# Altium PCB SE_13.PcbDoc (part 2 of 3)
Units mil, origin at the board's own origin, x right, y up, seen from the top; angles counter-clockwise.
Board outline 3937.01 x 3937.01 mil, 4 copper layers (Top, GND, PWR, Bottom), stack 35.4 mil thick; 269 components, 124 nets, 773 pads, 1135 vias.
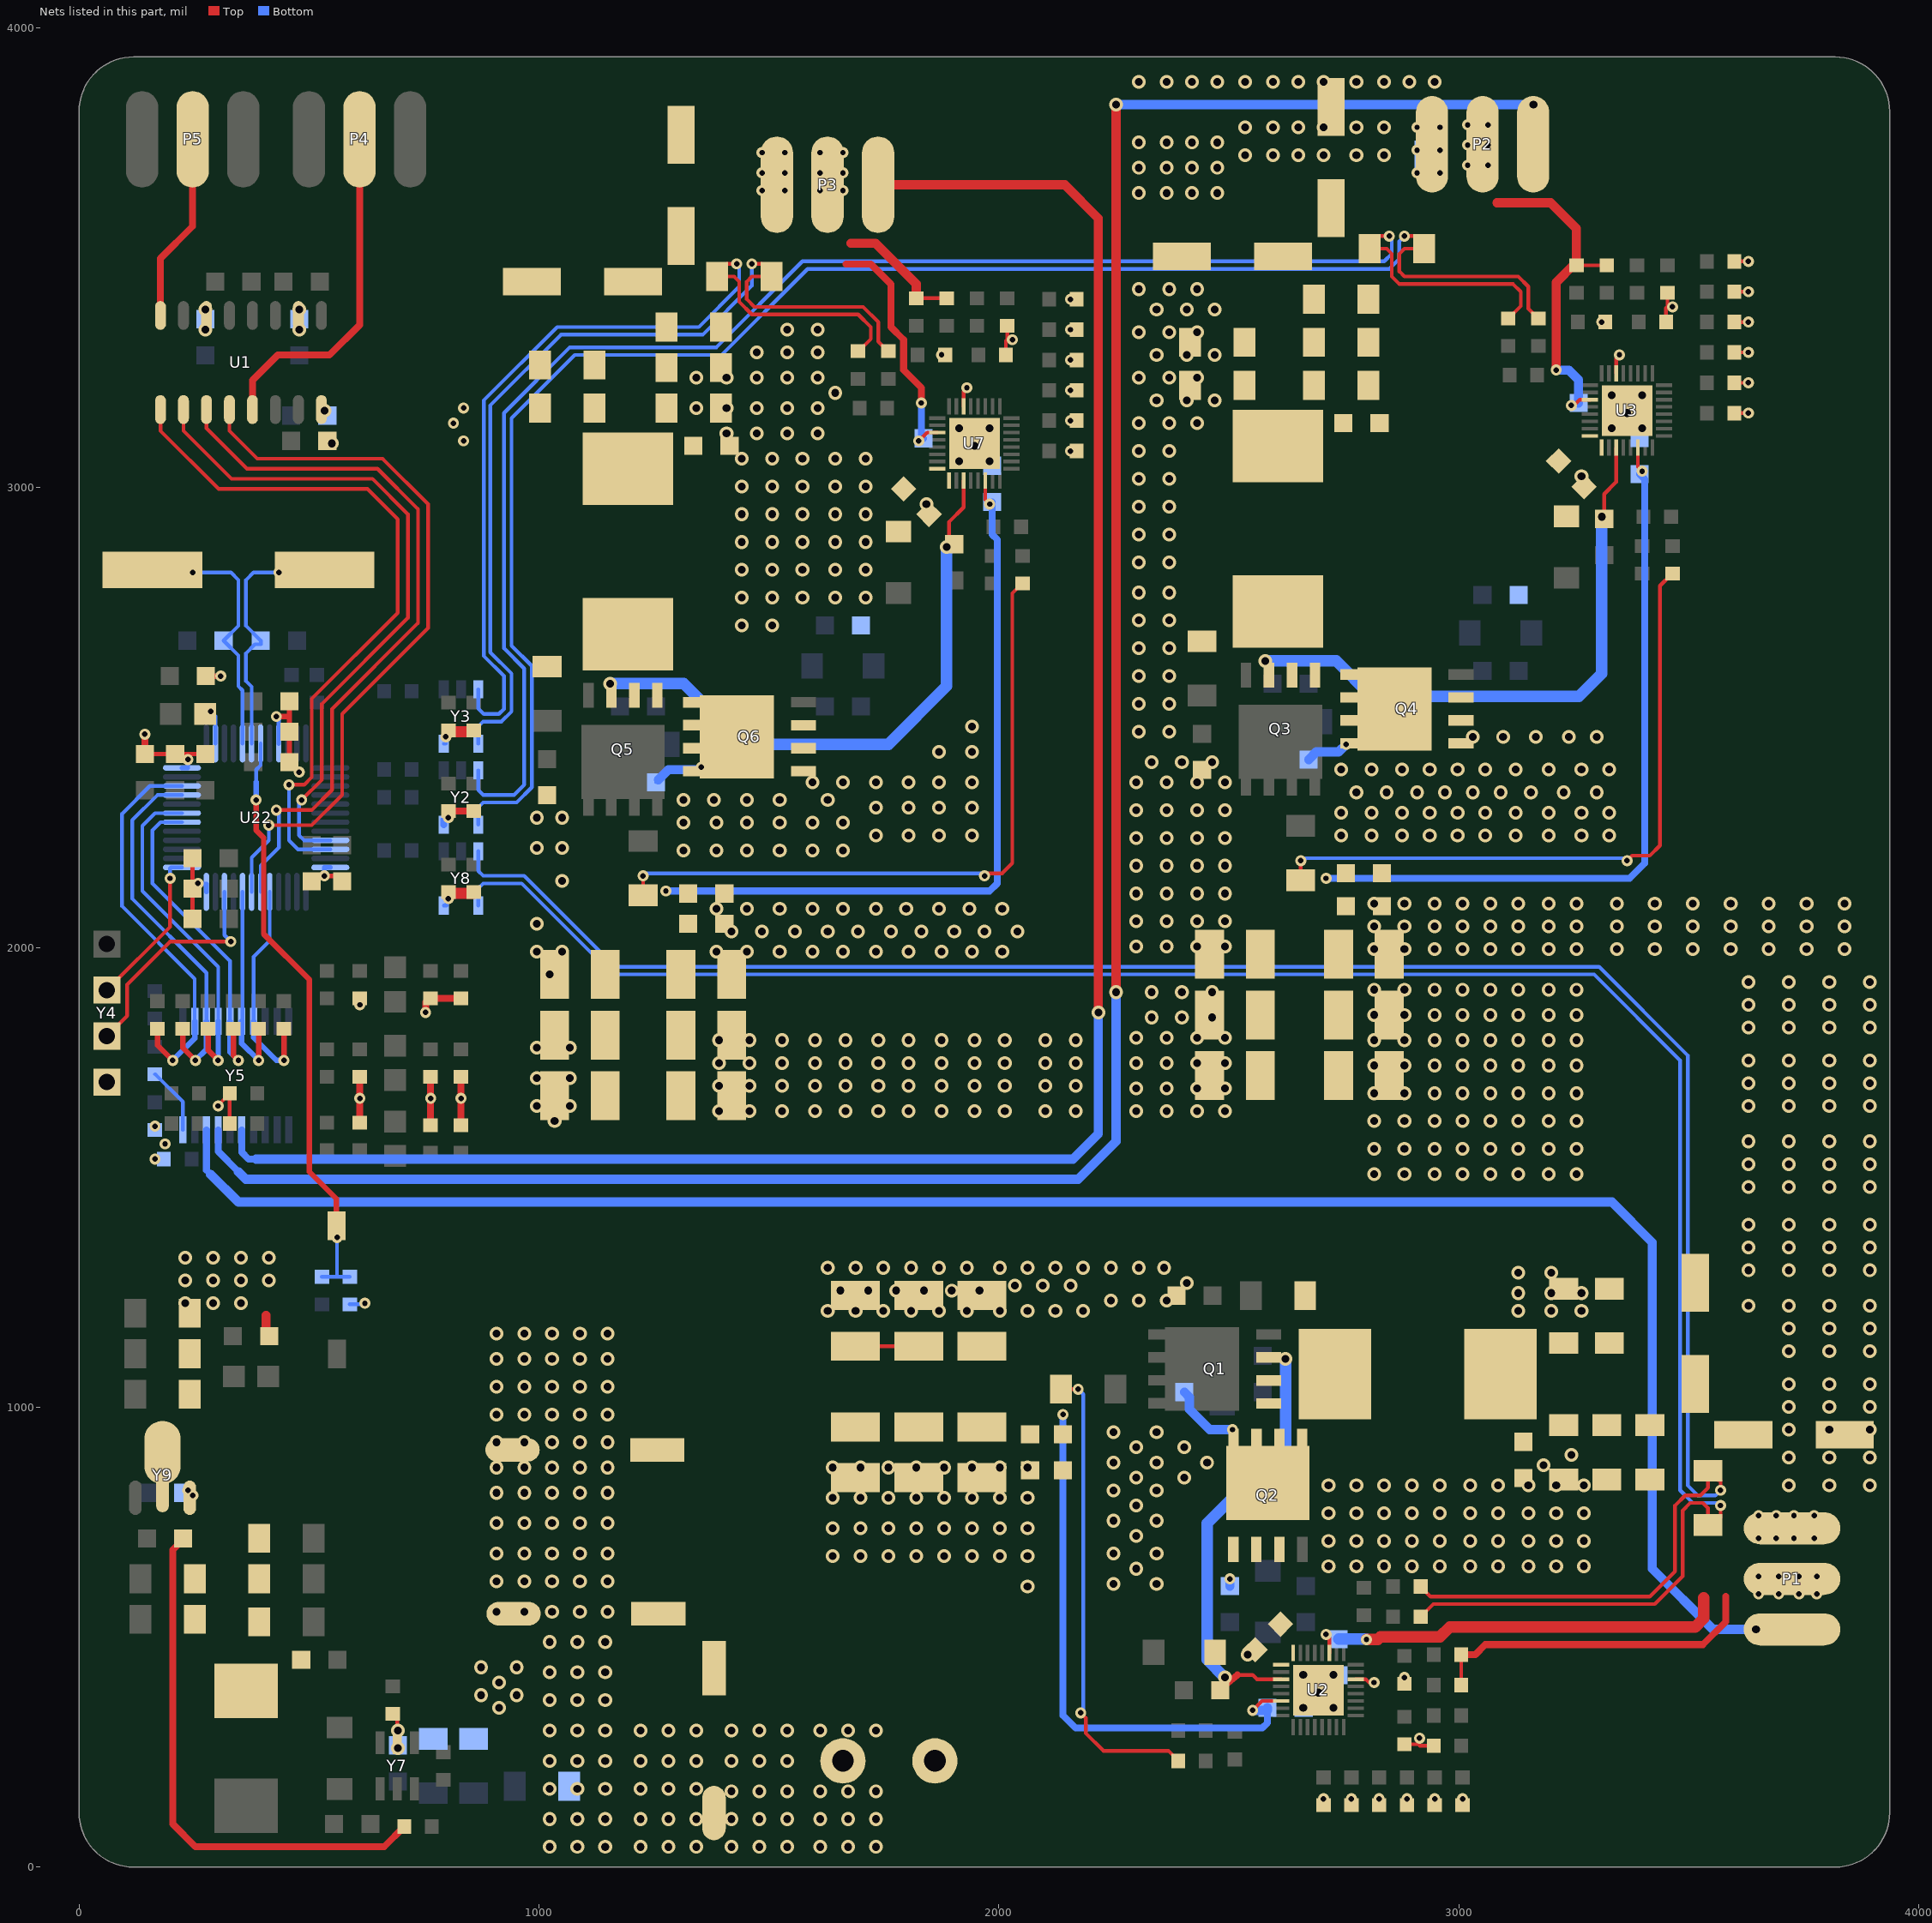
[diagram p4: the nets of this part, all layers, seen from the top]

## Via types
v1: diameter 30, hole 17, Top to Bottom, 881 vias
v2: diameter 24, hole 12, Top to Bottom, 254 vias

## Nets (pads, with @x,y where several pads share a name; then routed paths per layer and width w, separated by ;. In a path a pad name is that pad's centre, name@x,y a point inside that pad or via, vN(x,y) a via of type N, cw(c..) or ccw(c..) an arc to the next point about the centre after c; other vN are vias at no path point) (continued)
GND: C1.2 C2.2 C3.2 C4.2 C7.1 C8.2 C9.2 C10.2 C11.2 C12.2 C14.2 C15.2 C16.2 C17.2 C18.2 C19.2 C20.2 C22.1 C23.2 C24.2 C25.1 C26.2 C27.2 C28.2 C29.2 C30.2 C31.2 C32.2 C41.2 C42.2 C43.2 C44.2 C45.2 C46.2 C47.2 C48.2 C51.1 C53.1 C55.2 C56.2 C57.1 C58.2 C59.2 C60.2 C61.2 C62.2 C63.2 C64.2 C65.2 C74.2 C75.2 C76.2 C77.2 C78.2 C79.2 C80.2 C81.2 C82.2 C83.2 C84.2 C85.2 C88.1 C90.1 C92.2 C93.2 C94.1 C95.2 C96.2 C97.2 C98.2 C99.2 C100.2 C101.2 C107.2 C109.2 C110.2 C111.2 C112.2 P1.3 P2.3 P3.3 Q2.1 Q2.2 Q2.3 Q4.1 Q4.2 Q4.3 Q6.1 Q6.2 Q6.3 R1.1 R6.2 R11.1 R15.1 R16.1 R17.1 R18.1 R30.1 R37.1 R41.1 R42.1 R43.1 R44.1 R53.1 R60.1 R63.1 R64.1 R65.1 R66.1 U2.14 U2.25 U2.33 U3.14 U3.25 U3.33 U5.1 U7.14 U7.25 U7.33 | length 751.1
  Top w8: v2(1875.5,3289) R60.1@1883.42,3289 ; U7.14@1923.38,3177.21 1923.38,3210.38 v2(1930.5,3217.5) ; C93.2@2015.42,3289 2015.42,3319.65 v2@2018.5,3322.73 ; C92.2@2018.5,3352.58 v2@2018.5,3322.73 ; v2(2029.5,3322) 2028.77,3322.73 v2@2018.5,3322.73 ; v2(2156,3080) R64.1@2169.42,3080 ; v2(2156,3146) R63.1@2169.42,3146 ; v2(2156,3212) C96.2@2169.42,3212 ; v2(2156,3278) R65.1@2169.42,3278 ; v2(2156,3344) C97.2@2169.42,3344 ; v2(2156,3410) R66.1@2169.42,3410 ; R16.1@2706,135.08 v2(2706,148.5) ; R15.1@2766.5,135.08 v2(2766.5,148.5) ; U2.14@2775.71,408.62 2797.88,408.62 2805,401.5 v2(2816,401.5) ; C27.2@2827,135.08 v2(2827,148.5) ; C24.2@2882,267.08 2912.65,267.08 ; R1.1@2882,399.08 v2(2882,412.5) ; R17.1@2887.5,135.08 v2(2887.5,148.5) ; v2(2915,280.5) 2912.65,278.15 2912.65,267.08 ; C23.2@2945.58,264 2915.73,264 2912.65,267.08 ; C28.2@2948,135.08 v2(2948,148.5) ; R18.1@3008.5,135.08 v2(3008.5,148.5) ; v2(3311,3360.5) R37.1@3318.92,3360.5 ; U3.14@3342.38,3248.71 3342.38,3281.88 v2(3349.5,3289) ; C56.2@3450.92,3360.5 3450.92,3391.15 v2@3453.27,3393.5 ; C55.2@3454,3424.08 3454,3394.23 v2@3453.27,3393.5 ; v2(3465,3393.5) v2@3453.27,3393.5 ; R42.1@3599.42,3162.5 v2(3630,3162.5) ; R41.1@3599.42,3228.5 v2(3630,3228.5) ; C59.2@3599.42,3294.5 v2(3630,3294.5) ; R43.1@3599.42,3360.5 v2(3630,3360.5) ; C60.2@3599.42,3426.5 v2(3630,3426.5) ; R44.1@3599.42,3492.5 v2(3630,3492.5)
  Bottom w20: R11.1@2502.5,611.37 v2(2502.5,627)
  other v1: 1023,44 1083.5,44 1144,44 1221,44 1281.5,44 1342,44 1419,44 1479.5,44 1540,44 1611.5,44 1672,44 1732.5,44 1023,104.5 1083.5,104.5 1144,104.5 1221,104.5 1281.5,104.5 1342,104.5 1419,104.5 1479.5,104.5 1540,104.5 1611.5,104.5 1672,104.5 1732.5,104.5 1419,165 1479.5,165 1540,165 1611.5,165 1672,165 1732.5,165 1023,170.5 1083.5,170.5 1144,170.5 1221,170.5 1281.5,170.5 1342,170.5 1023,231 1083.5,231 1144,231 1221,231 1281.5,231 1342,231 1419,231 1479.5,231 1540,231 1023,297 1083.5,297 1144,297 1221,297 1281.5,297 1342,297 1419,297 1479.5,297 1540,297 1611.5,297 1672,297 1732.5,297 2662,346.5 2728,346.5 1023,363 1083.5,363 1144,363 2695,379.5 2662,418 2728,418 1023,423.5 1083.5,423.5 1144,423.5 2541,462 1023,489.5 1083.5,489.5 1144,489.5 907.5,555.5 968,555.5 1028.5,555.5 1089,555.5 1149.5,555.5 2062.5,610.5 2249.5,616 2343,616 907.5,621.5 968,621.5 1028.5,621.5 1089,621.5 1149.5,621.5 2299,649 2717,654.5 2777.5,654.5 2838,654.5 2898.5,654.5 2959,654.5 3025,654.5 3085.5,654.5 3151.5,654.5 3212,654.5 3272.5,654.5 1639,676.5 1699.5,676.5 1760,676.5 1820.5,676.5 1881,676.5 1941.5,676.5 2002,676.5 2062.5,676.5 907.5,682 968,682 1028.5,682 1089,682 1149.5,682 2249.5,682 2343,682 2717,709.5 2777.5,709.5 2838,709.5 2898.5,709.5 2959,709.5 3025,709.5 3085.5,709.5 3151.5,709.5 3212,709.5 3272.5,709.5 2299,720.5 1639,737 1699.5,737 1760,737 1820.5,737 1881,737 1941.5,737 2002,737 2062.5,737 907.5,748 968,748 1028.5,748 1089,748 1149.5,748 2249.5,753.5 2343,753.5 2717,770 2777.5,770 2838,770 2898.5,770 2959,770 3025,770 3085.5,770 3151.5,770 3212,770 3272.5,770 2299,786.5 1639,803 1699.5,803 1760,803 1820.5,803 1881,803 1941.5,803 2002,803 2062.5,803 907.5,814 968,814 1028.5,814 1089,814 1149.5,814 2249.5,819.5 2343,819.5 2717,830.5 2777.5,830.5 2838,830.5 2898.5,830.5 2959,830.5 3025,830.5 3085.5,830.5 3151.5,830.5 3212,830.5 3272.5,830.5 3718,830.5 3806,830.5 3894,830.5 2299,847 2403.5,847 907.5,869 968,869 1028.5,869 1089,869 1149.5,869 1639,869 1699.5,869 1760,869 1820.5,869 1881,869 1941.5,869 2002,869 2062.5,869 3184.5,874.5 2249.5,880 2343,880 2453,880 3718,891 3806,891 3894,891 3245,896.5 2299,913 2403.5,913 907.5,924 968,924 1028.5,924 1089,924 1149.5,924 2249.5,946 2343,946 3718,951.5 3806,951.5 3894,951.5 907.5,984.5 968,984.5 1028.5,984.5 1089,984.5 1149.5,984.5 3718,1001 3806,1001 3894,1001 907.5,1045 968,1045 1028.5,1045 1089,1045 1149.5,1045 3718,1050.5 3806,1050.5 3894,1050.5 907.5,1105.5 968,1105.5 1028.5,1105.5 1089,1105.5 1149.5,1105.5 3718,1122 3806,1122 3894,1122 907.5,1160.5 968,1160.5 1028.5,1160.5 1089,1160.5 1149.5,1160.5 3718,1171.5 3806,1171.5 3894,1171.5 1628,1210 1688.5,1210 1749,1210 1809.5,1210 1870,1210 1930.5,1210 2002,1210 2062.5,1210 2123,1210 2183.5,1210 3129.5,1210 3201,1210 3267,1210 3630,1221 3718,1221 3806,1221 3894,1221 2244,1232 2304.5,1232 2365,1232 3129.5,1248.5 3201,1248.5 3267,1248.5 1655.5,1254 1716,1254 1776.5,1254 1837,1254 1897.5,1254 1958,1254 2035,1265 2095.5,1265 2156,1265 2409,1270.5 3129.5,1292.5 3201,1292.5 3630,1298 3718,1298 3806,1298 3894,1298 1628,1303.5 1688.5,1303.5 1749,1303.5 1809.5,1303.5 1870,1303.5 1930.5,1303.5 2002,1303.5 2062.5,1303.5 2123,1303.5 2183.5,1303.5 2244,1303.5 2304.5,1303.5 2359.5,1303.5 3630,1347.5 3718,1347.5 3806,1347.5 3894,1347.5 3630,1397 3718,1397 3806,1397 3894,1397 3630,1479.5 3718,1479.5 3806,1479.5 3894,1479.5 2816,1507 2882,1507 2948,1507 3008.5,1507 3069,1507 3129.5,1507 3195.5,1507 3256,1507 3630,1529 3718,1529 3806,1529 3894,1529 2816,1562 2882,1562 2948,1562 3008.5,1562 3069,1562 3129.5,1562 3195.5,1562 3256,1562 3630,1578.5 3718,1578.5 3806,1578.5 3894,1578.5 1034,1622.5 2816,1622.5 2882,1622.5 2948,1622.5 3008.5,1622.5 3069,1622.5 3129.5,1622.5 3195.5,1622.5 3256,1622.5 1391.5,1644.5 1457.5,1644.5 1529,1644.5 1600.5,1644.5 1666.5,1644.5 1738,1644.5 1804,1644.5 1875.5,1644.5 1947,1644.5 2013,1644.5 2101,1644.5 2167,1644.5 2299,1644.5 2365,1644.5 2431,1644.5 2491.5,1644.5 995.5,1655.5 1067,1655.5 3630,1655.5 3718,1655.5 3806,1655.5 3894,1655.5 2816,1683 2882,1683 2948,1683 3008.5,1683 3069,1683 3129.5,1683 3195.5,1683 3256,1683 2299,1694 2365,1694 2431,1694 2491.5,1694 1391.5,1699.5 1457.5,1699.5 1529,1699.5 1600.5,1699.5 1666.5,1699.5 1738,1699.5 1804,1699.5 1875.5,1699.5 1947,1699.5 2013,1699.5 2101,1699.5 2167,1699.5 3630,1705 3718,1705 3806,1705 3894,1705 995.5,1716 1067,1716 2816,1743.5 2882,1743.5 2948,1743.5 3008.5,1743.5 3069,1743.5 3129.5,1743.5 3195.5,1743.5 3256,1743.5 1391.5,1749 1457.5,1749 1529,1749 1600.5,1749 1666.5,1749 1738,1749 1804,1749 1875.5,1749 1947,1749 2013,1749 2101,1749 2167,1749 2299,1749 2365,1749 2431,1749 2491.5,1749 3630,1754.5 3718,1754.5 3806,1754.5 3894,1754.5 995.5,1782 1067,1782 1391.5,1798.5 1457.5,1798.5 1529,1798.5 1600.5,1798.5 1666.5,1798.5 1738,1798.5 1804,1798.5 1875.5,1798.5 1947,1798.5 2013,1798.5 2101,1798.5 2167,1798.5 2816,1798.5 2882,1798.5 2948,1798.5 3008.5,1798.5 3069,1798.5 3129.5,1798.5 3195.5,1798.5 3256,1798.5 2299,1804 2365,1804 2431,1804 2491.5,1804 3630,1826 3718,1826 3806,1826 3894,1826 2332,1848 2398,1848 2464,1848 2816,1853.5 2882,1853.5 2948,1853.5 3008.5,1853.5 3069,1853.5 3129.5,1853.5 3195.5,1853.5 3256,1853.5 3630,1875.5 3718,1875.5 3806,1875.5 3894,1875.5 2332,1903 2398,1903 2464,1903 2816,1908.5 2882,1908.5 2948,1908.5 3008.5,1908.5 3069,1908.5 3129.5,1908.5 3195.5,1908.5 3256,1908.5 3630,1925 3718,1925 3806,1925 3894,1925 1023,1941.5 995.5,1991 1050.5,1991 1386,1991 1452,1991 1523.5,1991 1595,1991 1661,1991 1732.5,1991 1804,1991 1875.5,1991 1941.5,1991 2007.5,1991 2816,1996.5 2882,1996.5 2948,1996.5 3008.5,1996.5 3069,1996.5 3129.5,1996.5 3195.5,1996.5 3256,1996.5 3344,1996.5 3426.5,1996.5 3509,1996.5 3591.5,1996.5 3674,1996.5 3756.5,1996.5 3839,1996.5 2299,2002 2365,2002 2431,2002 2491.5,2002 1419,2035 1485,2035 1556.5,2035 1628,2035 1694,2035 1765.5,2035 1831.5,2035 1903,2035 1969,2035 2040.5,2035 2816,2046 2882,2046 2948,2046 3008.5,2046 3069,2046 3129.5,2046 3195.5,2046 3256,2046 3344,2046 3426.5,2046 3509,2046 3591.5,2046 3674,2046 3756.5,2046 3839,2046 995.5,2051.5 2299,2057 2365,2057 2431,2057 2491.5,2057 1386,2084.5 1452,2084.5 1523.5,2084.5 1595,2084.5 1661,2084.5 1732.5,2084.5 1798.5,2084.5 1870,2084.5 1936,2084.5 2007.5,2084.5 2816,2095.5 2882,2095.5 2948,2095.5 3008.5,2095.5 3069,2095.5 3129.5,2095.5 3195.5,2095.5 3256,2095.5 3344,2095.5 3426.5,2095.5 3509,2095.5 3591.5,2095.5 3674,2095.5 3756.5,2095.5 3839,2095.5 2299,2117.5 2365,2117.5 2431,2117.5 2491.5,2117.5 1050.5,2145 2299,2178 2365,2178 2431,2178 2491.5,2178 1314.5,2211 1386,2211 1452,2211 1523.5,2211 1595,2211 1661,2211 995.5,2216.5 1050.5,2216.5 2299,2238.5 2365,2238.5 2431,2238.5 2491.5,2238.5 1732.5,2244 1804,2244 1870,2244 1941.5,2244 2744.5,2244 2810.5,2244 2876.5,2244 2937,2244 2997.5,2244 3058,2244 3124,2244 3195.5,2244 3267,2244 3327.5,2244 1314.5,2271.5 1386,2271.5 1452,2271.5 1523.5,2271.5 1595,2271.5 1661,2271.5 995.5,2282.5 1050.5,2282.5 2744.5,2293.5 2810.5,2293.5 2876.5,2293.5 2937,2293.5 2997.5,2293.5 3058,2293.5 3124,2293.5 3195.5,2293.5 3267,2293.5 3327.5,2293.5 2299,2299 2365,2299 2431,2299 2491.5,2299 1732.5,2304.5 1804,2304.5 1870,2304.5 1941.5,2304.5 1314.5,2321 1380.5,2321 1452,2321 1523.5,2321 1628,2321 2777.5,2337.5 2843.5,2337.5 2909.5,2337.5 2970,2337.5 3030.5,2337.5 3091,2337.5 3157,2337.5 3228.5,2337.5 3300,2337.5 1595,2359.5 1661,2359.5 1732.5,2359.5 1804,2359.5 1870,2359.5 1941.5,2359.5 2299,2359.5 2365,2359.5 2431,2359.5 2491.5,2359.5 2744.5,2387 2810.5,2387 2876.5,2387 2937,2387 2997.5,2387 3058,2387 3124,2387 3195.5,2387 3267,2387 3327.5,2387 2332,2403.5 2398,2403.5 2464,2403.5 1870,2425.5 1941.5,2425.5 3030.5,2458.5 3096.5,2458.5 3168,2458.5 3239.5,2458.5 3300,2458.5 2304.5,2469.5 2370.5,2469.5 1941.5,2480.5 2304.5,2530 2370.5,2530 2304.5,2590.5 2370.5,2590.5 2304.5,2651 2370.5,2651 1441,2700.5 1507,2700.5 2304.5,2711.5 2370.5,2711.5 1441,2761 1507,2761 1573,2761 1644.5,2761 1710.5,2761 2304.5,2772 2370.5,2772 1441,2821.5 1507,2821.5 1573,2821.5 1644.5,2821.5 1710.5,2821.5 2304.5,2838 2370.5,2838 1441,2882 1507,2882 1573,2882 1644.5,2882 1710.5,2882 2304.5,2898.5 2370.5,2898.5 1441,2942.5 1507,2942.5 1573,2942.5 1644.5,2942.5 1710.5,2942.5 2304.5,2959 2370.5,2959 1842.5,2964.5 1441,3003 1507,3003 1573,3003 1644.5,3003 1710.5,3003 2304.5,3019.5 2370.5,3019.5 3267,3025 1914,3058 1980,3058 1441,3063.5 1507,3063.5 1573,3063.5 1644.5,3063.5 1710.5,3063.5 2304.5,3080 2370.5,3080 1947,3091 1408,3118.5 1474,3118.5 1540,3118.5 1606,3118.5 1914,3129.5 1980,3129.5 3333,3129.5 3399,3129.5 2304.5,3140.5 2370.5,3140.5 2431,3140.5 3366,3162.5 1342,3173.5 1408,3173.5 1474,3173.5 1540,3173.5 1606,3173.5 2343,3190 2409,3190 2469.5,3190 3333,3201 3399,3201 1644.5,3206.5 1342,3239.5 1408,3239.5 1474,3239.5 1540,3239.5 1606,3239.5 2304.5,3239.5 2370.5,3239.5 2431,3239.5 2343,3289 2409,3289 2469.5,3289 1474,3294.5 1540,3294.5 1606,3294.5 2304.5,3338.5 2370.5,3338.5 2431,3338.5 1540,3344 1606,3344 2343,3388 2409,3388 2469.5,3388 2304.5,3432 2370.5,3432 2431,3432 2304.5,3641 2365,3641 2420,3641 2475,3641 2304.5,3696 2365,3696 2420,3696 2475,3696 2535.5,3723.5 2596,3723.5 2651,3723.5 2706,3723.5 2777.5,3723.5 2838,3723.5 2304.5,3751 2365,3751 2420,3751 2475,3751 2535.5,3784 2596,3784 2651,3784 2706,3784 2777.5,3784 2838,3784 2304.5,3883 2365,3883 2420,3883 2475,3883 2535.5,3883 2596,3883 2651,3883 2706,3883 2777.5,3883 2838,3883 2893,3883 2948,3883
  other v2: 3652,715 3690.5,715 3729,715 3773,715 3652,764.5 3690.5,764.5 3729,764.5 3773,764.5 1485,3646.5 1534.5,3646.5 1485,3685 1534.5,3685 2909.5,3685 2959,3685 1485,3729 1534.5,3729 2909.5,3734.5 2959,3734.5 2909.5,3784 2959,3784
LED0: D1.K U22.2 | length 88.3
  Top w4.1: D1.K@273.9,2508 279.4,2513.5 v2(286,2513.5)
  Bottom w8: v2(286,2513.5) 296.42,2503.08 U22.2@296.42,2443.92
NRST: C108.1 R72.2 U22.7 Y6.1 | length 1297.5
  Top w8: Y6.1@559.61,1394.69 561,1393.3 v2(561,1369.5)
  Top w12: v2(385,2321) 385,2255 401.5,2238.5 401.5,2029.5 500.5,1930.5 500.5,1512.5 559.61,1453.39 Y6.1@559.61,1394.69
  Bottom w8: 385,2359.5 385,2387 394.84,2396.84 U22.7@394.84,2443.92 ; C108.1@528,1283.92 561,1283.92 ; v2(561,1369.5) 561,1283.92 ; R72.2@588.5,1283.92 561,1283.92
  Bottom w12: v2(385,2321) 385,2359.5
OSCIN: C105.2 U22.5 Y1.2 | length 491.7
  Bottom w8: v2(247.5,2816) 330,2816 346.5,2799.5 346.5,2699.63 C105.2@314.37,2667.5 346.5,2635.37 346.5,2568.5 355.47,2559.53 U22.5@355.47,2443.92
OSCOUT: C106.2 U22.6 Y1.1 | length 473
  Bottom w8: U22.6@375.16,2443.92 375.16,2567.34 363,2579.5 363,2640 382.44,2659.45 395.13,2659.45 C106.2@395.13,2667.5 363,2699.63 363,2799.5 379.5,2816 v2(434.5,2816)
PWM1: R100.2 U22.29 Y5.7 | length 487.3
  Top w12: v2(445.5,1754.5) R100.2@445.5,1823.58
  Bottom w8: Y5.7@379.38,1839.65 379.38,1979.88 414.53,2015.03 U22.29@414.53,2121.08
  Bottom w12: Y5.7@379.38,1839.65 379.38,1804.12 429,1754.5 v2(445.5,1754.5)
PWM2: R101.2 U22.32 Y5.6 | length 451.6
  Top w12: v2(390.5,1754.5) R101.2@390.5,1823.58
  Bottom w8: Y5.6@353.74,1839.65 355.47,1841.38 U22.32@355.47,2121.08
  Bottom w12: Y5.6@353.74,1839.65 353.74,1791.26 v2(390.5,1754.5)
PWM3: R102.2 U22.42 Y5.5 | length 723
  Top w12: R102.2@335.5,1823.58 335.5,1765.5 v2(346.5,1754.5)
  Bottom w8: U22.42@223.58,2272.66 177.16,2272.66 159.5,2255 159.5,2139.5 328.2,1970.8 Y5.5@328.2,1839.65
  Bottom w12: Y5.5@328.2,1839.65 328.2,1772.8 v2(346.5,1754.5)
PWM4: R103.2 U22.43 Y5.4 | length 754.4
  Top w12: R103.2@280.5,1823.58 280.5,1776.5 v2(302.5,1754.5)
  Bottom w8: U22.43@223.58,2292.34 165,2292.34 137.5,2264.84 137.5,2123 302.62,1957.88 Y5.4@302.62,1839.65
  Bottom w12: v2(302.5,1754.5) 302.62,1754.62 Y5.4@302.62,1839.65
PWM5: R104.2 U22.45 Y5.3 | length 810.4
  Top w12: R104.2@225.5,1823.58 225.5,1782 v2(253,1754.5)
  Bottom w8: U22.45@223.58,2331.71 170.5,2331.71 115.5,2276.71 115.5,2106.5 277.03,1944.97 Y5.3@277.03,1839.65
  Bottom w12: v2(253,1754.5) 277.03,1778.53 Y5.3@277.03,1839.65
PWM6: R105.2 U22.46 Y5.2 | length 859.6
  Top w12: R105.2@170.5,1823.58 170.5,1787.5 v2(203.5,1754.5)
  Bottom w8: U22.46@223.58,2351.4 154,2351.4 93.5,2290.9 93.5,2090 251.44,1932.06 Y5.2@251.44,1839.65
  Bottom w12: v2(203.5,1754.5) 251.44,1802.44 Y5.2@251.44,1839.65
PWM_OUT1: P1.1 Y5.18 | length 4365.2
  Top w4.1: v1(3646.5,517) 3647,517.5 P1.1@3725,517.5
  Bottom w15: Y5.18@277.03,1603.55 277.03,1515.97 286,1507
  Bottom w20: 286,1507 346.5,1446.5 3333,1446.5 3421,1358.5 3421,649 3553,517 v1(3646.5,517)
PWM_OUT2: P2.1 Y5.17 | length 5307.7
  Top w4.1: P2.1@3162,3747 3162,3833 v1(3162.5,3833.5)
  Top w20: v1(2255,1903) v1(2255,3833.5)
  Bottom w15: Y5.17@302.62,1603.35 302.62,1556.38 346.5,1512.5
  Bottom w20: 346.5,1512.5 363,1496 2172.5,1496 2255,1578.5 v1(2255,1903) ; v1(2255,3833.5) v1(3162.5,3833.5)
PWM_OUT3: P3.1 Y5.15 | length 4440.5
  Top w20: P3.1@1737.5,3659 2143.5,3659 2216.5,3586 v1(2216.5,1859)
  Bottom w15: Y5.15@353.8,1603.35 353.8,1554.7 368.5,1540 385,1540
  Bottom w20: 385,1540 2161.5,1540 2216.5,1595 v1(2216.5,1859)
RIN1: P4.2 U1.13 | length 750.3
  Top w15: U1.13@377,3170.14 377,3234 432,3289 544.5,3289 610,3354.5 P4.2@610,3758
RIN2: P5.2 U1.8 | length 412.1
  Top w15: U1.8@177,3374.87 177,3499 247,3569 P5.2@247,3758
SW1_1: C6.2 L1.1 Q1.1 Q1.2 Q1.3 Q2.5 Q2.6 Q2.7 Q2.8 Q2.9 R10.2 R25.1 U2.27 | length 1153.8
  Top w4.1: v2(2508,951.5) 2510.2,949.3 Q2.8@2510.2,926.01
  Top w8: C6.2@2481.37,385 2491.5,385 v1(2491.5,412.5) ; 2519,418 2552,418 2561.38,408.62 U2.27@2614.29,408.62
  Top w15: C6.2@2481.37,385 2481.37,397.19 2493.56,397.19 2519,418
  Bottom w20: R10.2@2403.5,1033.13 2414.5,1022.13 2414.5,995.79 2458.79,951.5 v2(2508,951.5)
  Bottom w25: v1(2491.5,412.5) 2453,451 2453,748 2623.5,918.5 v1(2623.5,1105.5)
SW1_2: C50.2 L3.1 Q3.1 Q3.2 Q3.3 Q4.5 Q4.6 Q4.7 Q4.8 Q4.9 R29.2 R49.1 U3.27 | length 1401.2
  Top w4.1: v2(2755.5,2442) 2757.7,2444.2 Q4.8@2769.99,2444.2
  Top w8: C50.2@3316.5,2932.37 3316.5,2986.5 3342.38,3012.38 U3.27@3342.38,3087.29
  Bottom w20: R29.2@2673.87,2409 2690.37,2425.5 2739,2425.5 v2(2755.5,2442)
  Bottom w25: v1(2579.5,2623.5) 2733.5,2623.5 2810.5,2546.5 3261.5,2546.5 3311,2596 v1(3311,2937)
SW1_3: C87.2 L4.1 Q5.1 Q5.2 Q5.3 Q6.5 Q6.6 Q6.7 Q6.8 Q6.9 R52.2 R71.1 U7.27 | length 1440.9
  Top w4.1: Q6.8@1339.99,2383.7 1348.79,2392.5 v2(1353,2392.5)
  Top w8: v1(1886.5,2871) C87.2@1892,2877.37 ; C87.2@1903,2877.37 C87.2@1892,2877.37 ; U7.27@1923.38,3015.79 1923.38,2957.38 1892,2926 C87.2@1892,2877.37
  Bottom w8: R52.2@1254.87,2359.5 1254.87,2360.37 R52.2@1259.5,2365
  Bottom w20: R52.2@1259.5,2365 1281.5,2387 1347.5,2387 v2(1353,2392.5)
  Bottom w25: v1(1155,2574) 1314.5,2574 1446.5,2442 1760,2442 1886.5,2568.5 v1(1886.5,2871)
SW2_1: C3.1 C8.1 C10.1 C12.1 C18.1 C19.1 C29.1 C30.1 L1.2 R5.1 R12.1 Y8.3 | length 4771.4
  Top w8: R12.1@2917.42,610.5 2917.42,606.71 2928.38,598.75 2938.63,588.5 3415.5,588.5 3470.5,643.5 3470.5,786.5 3492.5,808.5 3525.5,808.5 3542,825 R5.1@3542,862.06 3543.44,862.06 3564,841.5 3569.5,841.5 v2(3569.5,819.5)
  Bottom w8: Y8.3@867.9,2209.55 867.9,2167 878.9,2156 968,2156 1166,1958 3305.5,1958 3498,1765.5 3498,830.5 3520.31,808.19 3558.19,808.19 v2(3569.5,819.5)
SW2_2: C41.1 C42.1 C43.1 C61.1 C62.1 C63.1 C64.1 C65.1 L3.2 R32.1 R35.1 Y2.3 | length 3626.4
  Top w8: v2(2849,3547.5) 2821.5,3547.5 2806.44,3532.44 R32.1@2806.44,3520 2843.5,3520 2854.5,3509 2854.5,3459.5 2871,3443 3118.5,3443 3135,3426.5 3135,3395.15 3107.5,3367.65 R35.1@3107.5,3368.42
  Bottom w8: Y2.3@867.9,2385.55 867.9,2343 878.9,2332 946,2332 968,2354 968,2607 924,2651 924,3162.5 1067,3305.5 1386,3305.5 1573,3492.5 2838,3492.5 2854.5,3509 2854.5,3542 v2(2849,3547.5)
SW2_3: C78.1 C79.1 C80.1 C98.1 C99.1 C100.1 C101.1 C107.1 L4.2 R55.1 R58.1 Y3.3 | length 2034
  Top w8: v2(1430,3487) 1408,3487 1387.44,3466.44 R55.1@1387.44,3459.5 1424.5,3459.5 1435.5,3448.5 1435.5,3404.5 1463,3377 1694,3377 1721.5,3349.5 1721.5,3323.63 1694.79,3296.92 R58.1@1694,3296.92
  Bottom w8: Y3.3@867.9,2561.55 867.9,2520.1 880,2508 913,2508 924,2519 924,2590.5 880,2634.5 880,3190 1039.5,3349.5 1347.5,3349.5 1435.5,3437.5 1435.5,3481.5 v2(1430,3487)
SWCLK: U22.37 Y4.2 | length 348.3
  Top w8: Y4.2@60.5,1907.5 198,2045 v2(198,2150.5)
  Bottom w8: v2(198,2150.5) 198,2172.5 199.73,2174.23 U22.37@223.58,2174.23
SWIO: U22.34 Y4.3 | length 508.3
  Top w8: Y4.3@60.5,1807.5 104.5,1851.5 104.5,1919.5 198,2013 v2(330,2013)
  Bottom w8: U22.34@316.1,2121.08 316.1,2026.9 v2(330,2013)
USART1_RX: U1.12 U22.31 | length 1601.4
  Top w8: U1.12@327,3170.14 327,3124 387.5,3063.5 660,3063.5 759,2964.5 759,2695 572,2508 572,2332 506,2266 v2(412.5,2266)
  Bottom w8: U22.31@375.16,2121.08 375.16,2195.66 412.5,2233 v2(412.5,2266)
USART1_TX: U1.11 U22.30 | length 1597.4
  Top w8: U1.11@277,3170.14 277,3129.5 365,3041.5 649,3041.5 737,2953.5 737,2706 550,2519 550,2343 506,2299 v2(429,2299)
  Bottom w8: U22.30@394.84,2121.08 394.84,2178 434.5,2217.66 434.5,2293.5 v2(429,2299)
USART3_RX: U1.9 U22.22 | length 1555.6
  Top w8: U1.9@177,3170.14 177,3124 303.5,2997.5 627,2997.5 693,2931.5 693,2728 506,2541 506,2370.5 489.5,2354 v2(456.5,2354)
  Bottom w8: v2(456.5,2354) 456.5,2233 475.9,2213.6 U22.22@546.42,2213.6
USART3_TX: U1.10 U22.21 | length 1478.1
  Top w8: U1.10@227,3170.14 227,3124 331.5,3019.5 638,3019.5 715,2942.5 715,2717 528,2530 528,2365 v2(484,2321)
  Bottom w8: v2(484,2321) 478.5,2315.5 478.5,2244 489.21,2233.29 U22.21@546.42,2233.29
V+: C139.1 U1.2
  other v1: 478.5,3344 478.5,3388
V-: C138.1 U1.6
  other v1: 275,3344 275,3388
VCC_1: C7.2 D3.2 U2.24
VCC_2: C51.2 D8.2 U3.24
VCC_3: C88.2 D12.2 U7.24
VCC_3.3V: C66.1 C67.1 C68.1 C69.1 C70.1 C71.1 C72.1 C73.1 C102.1 C103.1 C104.1 C113.2 C114.2 C118.2 C119.2 C120.2 C121.2 C122.2 C123.2 C126.2 C127.2 R21.2 R22.2 R23.2 R40.2 R45.2 R46.2 R47.2 R67.2 R68.2 R69.2 R72.1 R81.2 R84.2 R85.2 U22.9 U22.24 U22.36 U22.48 Y2.5 Y3.5 Y4.4 Y8.5 Y9.3 | length 1611.2
  Top w4.1: v2(610.5,1875.5) R47.2@610.5,1889.58
  Top w8: v2(302.5,1655.5) 302.5,1657.13 327.58,1682.21 R81.2@327.58,1683 R40.2@327.58,1617 ; v2(797.5,2458.5) 797.5,2472.58 C113.2@803,2472.58 ; v2(803,2106.5) C126.2@803,2120.58 ; v2(803,2282.5) C122.2@803,2296.58
  Top w10: C72.1@143,2420.87 C102.1@209,2420.87 C103.1@275,2420.87 ; C69.1@246.63,2062.5 C66.1@246.63,2128.5 C67.1@246.63,2194.5 ; v2(533.5,2156) 572,2156 C71.1@572,2144.13
  Top w12: R84.2@275.87,2590.5 v2(308,2590.5) ; v2(429,2502.5) 457.37,2502.5 ; C104.1@457.37,2403.5 C68.1@457.37,2469.5 457.37,2502.5 ; C73.1@457.37,2535.5 457.37,2502.5
  Top w15: C72.1@143,2420.87 v2(143,2464) ; R23.2@610.5,1619.42 v2(610.5,1672) R69.2@610.5,1719.08 ; v2(753.5,1859) 753.5,1881 762.08,1889.58 R45.2@764.5,1889.58 R46.2@830.5,1889.58 ; R21.2@764.5,1613.92 v2(764.5,1672) R67.2@764.5,1719.08 ; C122.2@803,2296.58 C123.2@858,2296.58 ; R22.2@830.5,1613.92 v2(830.5,1672) R68.2@830.5,1719.08
  Top w20: 406.52,1199.99 406.52,1161.85 R85.2@413.37,1155
  Top w24: C126.2@803,2120.58 803,2117.62 858,2117.62 C127.2@858,2120.58 ; C113.2@803,2472.58 803,2469.62 858,2469.62 C114.2@858,2472.58
  Bottom w8: R72.1@588.5,1224.08 619.08,1224.08 v2(621.5,1226.5) ; Y8.5@793.1,2091.44 799.34,2091.44 799.34,2106.5 v2(803,2106.5) ; Y3.5@793.1,2443.44 797.5,2443.44 v2(797.5,2458.5)
  Bottom w10: U22.48@223.58,2390.77 236.5,2390.77 v2(236.5,2409) ; v2(258.5,2139.5) 276.73,2137.77 U22.36@276.73,2121.08 ; v2(429,2502.5) 434.5,2497 434.21,2496.71 U22.9@434.21,2443.92 ; v2(533.5,2156) 533.5,2174.23 U22.24@546.42,2174.23
  Bottom w15: Y2.5@793.1,2267.44 793.1,2278.17 v2(803,2282.5)
  other v1: 231,1226.5 291.5,1226.5 352,1226.5 231,1276 291.5,1276 352,1276 412.5,1276 231,1325.5 291.5,1325.5 352,1325.5 412.5,1325.5
  other v2: 247.5,808.5 236.5,819.5 478.5,2381.5
VCC_5.0V: C37.2 C38.2 C39.2 C40.2 C115.2 C116.2 C117.2 C132.1 C133.1 C136.2 C137.2 L2.2 R27.1 R93.1 U1.16 Y5.20 Y9.2 Y9.4 | length 1320.2
  Top w15: C116.2@226.37,715 226.37,712.88 203.5,690.01 203.5,93.5 253,44 663.08,44 R27.1@707.08,88
  Bottom w8: R93.1@165,1724.58 165.79,1724.58 225.84,1664.53 Y5.20@225.84,1603.35
  other v1: 550,3096.5 533.5,3168
  other v2: 165,1540 187,1573 165,1611.5 836,3102 814,3140.5 836,3173.5
VCC_IN: C1.1 C2.1 C4.1 C9.1 C11.1 C14.1 C15.1 C16.1 C17.1 C20.1 C25.2 C32.1 C33.2 C34.2 C35.2 C44.1 C45.1 C46.1 C47.1 C48.1 C57.2 C75.1 C76.1 C77.1 C81.1 C82.1 C83.1 C84.1 C85.1 C94.2 C110.1 C111.1 C112.1 R7.2 R8.2 R26.1 R31.2 R33.2 R54.2 R56.2 U2.30 U3.30 U5.2 U7.30 Y7.5 | length 8792.4
  Top w8: R26.1@682,333.08 691.9,323.18 v1@691.9,297 ; R54.2@1226.5,2113.44 v2(1226.5,2156) ; C11.1@1688.5,1132.88 C1.1@1826,1132.88 ; v2(1969,2156) 1974.5,2161.5 2007.5,2161.5 2029.5,2183.5 2029.5,2770.37 2050.71,2791.58 R56.2@2051.5,2791.58 ; U7.30@1970.62,3015.79 1970.62,2973.88 v2(1980,2964.5) ; R7.2@2135.44,1039.5 v2(2172.5,1039.5) ; v2(2178,335.5) 2189,324.5 2189,291.5 2227.5,253 2368.87,253 2390.08,231.79 R8.2@2390.08,231 ; v2(2552,341) 2572.38,361.38 U2.30@2614.29,361.38 ; R31.2@2656.5,2146.44 v2(2656.5,2189) ; v2(3366,2189) 3377,2200 3415.5,2200 3437.5,2222 3437.5,2786.87 3464.21,2813.58 R33.2@3465,2813.58 ; U3.30@3389.62,3087.29 3389.62,3045.38 v2(3399,3036) ; Y7.5@691.9,270.5 Y7.5@691.9,275 ; Y7.5@691.9,270.5 v1@691.9,297 ; Y7.5@691.9,270.5 693,270.5 v1(693,297) ; Y7.5@691.9,270.5 Y7.5@693,269.4 ; Y7.5@691.9,275 693,273.9 Y7.5@693,269.4 ; Y7.5@691.9,275 v1@691.9,297 ; v1@691.9,297 v1(693,297) ; Y7.5@693,269.4 v1(693,297)
  Bottom w4.1: C57.2@3393.5,3030.5 v2(3399,3036)
  Bottom w8: v1(693,258.5) C33.2@693,264.87 v1(693,297) ; v2(1226.5,2156) 1232,2161.5 1963.5,2161.5 v2(1969,2156) ; v2(2172.5,1039.5) 2183.5,1028.5 2183.5,341 v2(2178,335.5) ; v2(2656.5,2189) 2662,2189 2667.5,2194.5 3360.5,2194.5 v2(3366,2189) ; C57.2@3393.5,3029.63 C57.2@3393.5,3030.5 ; v2(1980,2964.5) 1984.63,2969.13 C94.2@1985.5,2969.13 1985.5,2964.5 v2(1980,2964.5)
  Bottom w15: v2(1276,2123) 1980,2123 1996.5,2139.5 1996.5,2887.5 1985.5,2898.5 C94.2@1985.5,2969.13 ; v2(2139.5,984.5) 2139.5,330 2167,302.5 2573.13,302.5 2584.13,313.5 C25.2@2584.13,346.5 ; v2(2711.5,2150.5) 3371.5,2150.5 3404.5,2183.5 3404.5,3018.63 C57.2@3393.5,3029.63
  Bottom w20: v2(2552,341) 2584.13,341 C25.2@2584.13,346.5
  other v1: 913,346.5 874.5,374 951.5,374 913,401.5 874.5,434.5 951.5,434.5
VCC_OUT1: C13.1 C22.2 C26.1 P1.2 R4.2 R5.2 R13.1 U2.19 Y8.4 | length 6398.5
  Top w8: v2(2711.5,506) 2718.62,498.88 U2.19@2718.62,465.71 ; R13.1@2917.42,544.5 2928.38,544.5 2928.38,555.5 2944.88,572 3426.5,572 3487,632.5 3487,775.5 3503.5,792 3531,792 3542,781 R5.2@3542,743.94 3557.06,759 3569.5,759 v2(3569.5,786.5) ; R4.2@3005.42,396 C13.1@3005.42,462
  Top w15: C13.1@3005.42,462 3036,462 3058,484 3531,484 3580.5,533.5 3580.5,588.5
  Top w25: v2(2799.5,495) 2824,495 2829.5,500.5 2959,500.5 2981,522.5 3514.5,522.5 3532.72,540.72 3532.72,585.71
  Bottom w8: Y8.4@867.9,2091.44 867.9,2128.5 878.9,2139.5 962.5,2139.5 1160.5,1941.5 3294.5,1941.5 3481.5,1754.5 3481.5,819.5 3509,792 3564,792 v2(3569.5,786.5)
  Bottom w25: C22.2@2739,495.87 2798.63,495.87 v2(2799.5,495)
  other v2: 3652,594 3696,594 3740,594 3778.5,594 3652,632.5 3696,632.5 3740,632.5 3778.5,632.5
VCC_OUT2: C53.2 C54.1 C58.1 P2.2 R32.2 R36.1 R38.2 U3.19 Y2.4 | length 4397.8
  Top w8: v2(2882,3547.5) 2904,3547.5 2924.56,3526.94 R32.2@2924.56,3520 2882,3520 2871,3509 2871,3470.5 2882,3459.5 3129.5,3459.5 3151.5,3437.5 3151.5,3389.63 3172.71,3368.42 R36.1@3173.5,3368.42 ; v2(3245,3179) 3250.5,3179 3263.12,3191.62 U3.19@3285.29,3191.62 ; C54.1@3256,3483.92 R38.2@3322,3483.92
  Top w20: 3083.51,3620.06 3199.94,3620.06 3256,3564 C54.1@3256,3483.92 3256,3486.82 3252.32,3486.82 3212,3446.5 v2(3212,3256)
  Bottom w8: Y2.4@867.9,2267.44 867.9,2304.5 878.9,2315.5 951.5,2315.5 984.5,2348.5 984.5,2612.5 940.5,2656.5 940.5,3151.5 1078,3289 1397,3289 1584,3476 2849,3476 2870.69,3497.69 2870.69,3536.19 v2(2882,3547.5)
  Bottom w20: v2(3212,3256) 3239.5,3256 3260.63,3234.87 C53.2@3260.63,3184.5
  other v2: 3019.5,3701.5 3063.5,3701.5 3019.5,3745.5 3063.5,3745.5 3019.5,3789.5 3063.5,3789.5
VCC_OUT3: C90.2 C91.1 C95.1 P3.2 R55.2 R59.1 R61.2 U7.19 Y3.4 | length 2882.8
  Top w8: v2(1463,3487) 1485,3487 1505.56,3466.44 R55.2@1505.56,3459.5 1463,3459.5 1452,3448.5 1452,3410 1468.5,3393.5 1705,3393.5 1738,3360.5 1738,3318.13 1759.21,3296.92 R59.1@1760,3296.92 ; C91.1@1820.5,3412.42 R61.2@1886.5,3412.42 ; v2(1826,3102) 1844.12,3120.12 U7.19@1866.29,3120.12
  Top w15: 1667.66,3486.54 1721.96,3486.54 1765.5,3443 1765.5,3349.5 1793,3322 1793,3256 1831.5,3217.5 v2(1831.5,3184.5)
  Top w20: 1678.5,3531.75 1731.75,3531.75 1820.5,3443 C91.1@1820.5,3412.42
  Bottom w4.1: v2(1826,3102) 1831.5,3107.5 C90.2@1836.13,3107.5
  Bottom w8: Y3.4@867.9,2443.44 867.9,2480.5 878.9,2491.5 918.5,2491.5 940.5,2513.5 940.5,2596 894,2642.5 894,3179 1048,3333 1356.3,3333 1463,3439.7 v2(1463,3487)
  Bottom w15: v2(1831.5,3184.5) 1831.5,3112.13 C90.2@1836.13,3107.5
  other v2: 1611.5,3646.5 1661,3646.5 1611.5,3685 1661,3685 1611.5,3729 1661,3729
pads on no net: U2.2 U2.5 U2.6 U2.7 U2.9 U2.13 U2.20 U2.21 U2.22 U2.23 U3.2 U3.5 U3.6 U3.7 U3.9 U3.13 U3.20 U3.21 U3.22 U3.23 U7.2 U7.5 U7.6 U7.7 U7.9 U7.13 U7.20 U7.21 U7.22 U7.23 U22.1 U22.3 U22.4 U22.10 U22.14 U22.15 U22.16 U22.17 U22.18 U22.19 U22.28 U22.33 U22.38 U22.39 U22.40 U22.41 Y5.11 Y5.12 Y5.13 Y5.14 Y5.16

## Polygon pours and split planes (outlines as drawn)
SW2_2 on Top "Top-SW2_2" (solid, remove dead copper, pour order 202): 2513.5,3019.5 2695,3019.5 2695,3113 2766.5,3113 2766.5,3162.5 2706,3162.5 2706,3355 2513.5,3355
GND on Top "Top-GND" (solid, remove dead copper, pour order 200): 2618,649 2618,577.5 2761,577.5 2761,632.5 3454,632.5 3454,924 3179,924 3179,891 3102,891 3102,863.5 2684,863.5 2684,649
GND on Top "Top-GND 1" (solid, remove dead copper, pour order 198): 973.5,2370.5 973.5,1606 1094.5,1606 1094.5,2189 1078,2189 1078,2370.5
GND on Top "Top-GND 2" (solid, remove dead copper, pour order 194): 2623.5,437.25 2623.5,456.5 2565.75,514.25 2524.5,473 2560.25,437.25
GND on Top "Top-GND 3" (solid, remove dead copper, pour order 192): 1523.5,2508 1523.5,2354 1287,2354 1287,2156 1358.5,2156 1358.5,1617 1760,1617 1760,2508
GND on Top "Top-GND 4" (solid, remove dead copper, pour order 190): 1320,3410 1320,3135 1369.5,3135 1369.5,3063.5 1402.5,3063.5 1402.5,2673 1523.5,2673 1523.5,2563 1617,2563 1617,2464 1760,2464 1760,2733.5 1738,2733.5 1738,3118.5 1666.5,3118.5 1666.5,3410
VCC_5.0V on Top "Top-VCC_5.0V" (solid, remove dead copper, pour order 188): 297,330 423.5,330 423.5,748 203.5,748 203.5,687.5 225.5,687.5 225.5,412.5 297,412.5
VCC_1 on Top "Top-VCC_1" (solid, remove dead copper, pour order 180): 2607,561 2442,561 2442,440 2502.5,440 2502.5,522.5 2607,522.5
$$$31354 on Top "Top-$$$31354" (solid, remove dead copper, pour order 178): 973.5,2546.5 973.5,2387 1078,2387 1078,2546.5
VCC_3 on Top "Top-VCC_3" (solid, remove dead copper, pour order 174): 1754.5,3003 1754.5,2876.5 1809.5,2876.5 1809.5,2926 1798.5,2937 1798.5,3003
VCC_2 on Top "Top-VCC_2" (solid, remove dead copper, pour order 170): 3300,3118.5 3250.5,3118.5 3190,3058 3190,3030.5 3217.5,3030.5 3294.5,3107.5 3300,3107.5
GND on Top "Top-GND 5" (solid, remove dead copper, pour order 160): 1177,1193.5 880,1193.5 880,522.5 1177,522.5
VCC_OUT1 on Top "Top-VCC_OUT1" (solid, remove dead copper, pour order 158): 3509,770 3509,566.5 3844.5,566.5 3844.5,660 3591.5,660 3591.5,770
$$$29648 on Top "Top-$$$29648" (solid, remove dead copper, pour order 156): 2706,2238.5 2706,2552 2519,2552 2519,2238.5
VCC_5.0V on Top "Top-VCC_5.0V 1" (solid, remove dead copper, pour order 154): 412.5,423.5 506,423.5 506,473 412.5,473
$$$20041 on Top "Top-$$$20041" (solid, remove dead copper, pour order 152): 2315.5,506 2315.5,346.5 2425.5,346.5 2425.5,506
VCC_1 on Top "Top-VCC_1 1" (solid, remove dead copper, pour order 150): 2645.5,451 2645.5,561 2585,561 2585,511.5 2629,467.5 2629,451
GND on Top "Top-GND 6" (solid, remove dead copper, pour order 148): 990,555.5 990,5.5 1776.5,5.5 1776.5,346.5 1177,346.5 1177,555.5
SW1_3 on Top "Top-SW1_3" (solid, remove dead copper, pour order 144): 1133,2524.5 1292.5,2524.5 1292.5,2761 1100,2761 1100,2607 1133,2607
VCC_5.0V on Top "Top-VCC_5.0V 2" (solid, remove dead copper, pour order 140): 137.5,1512.5 214.5,1512.5 214.5,1595 181.5,1595 181.5,1633.5 137.5,1633.5
VCC_5.0V on Top "Top-VCC_5.0V 3" (solid, remove dead copper, pour order 138): 313.5,682 423.5,682 423.5,781 753.5,781 753.5,1369.5 643.5,1369.5 643.5,858 313.5,858
VCC_5.0V on Top "Top-VCC_5.0V 4" (solid, pour order 132): 643.5,1298 951.5,1298 951.5,3036 885.5,3036 885.5,1386 643.5,1386
$$$31337 on Top "Top-$$$31337" (solid, remove dead copper, pour order 130): 1094.5,2205.5 1276,2205.5 1276,2508 1094.5,2508
GND on Top "Top-GND 7" (solid, remove dead copper, pour order 126): 2409,2420 2409,1617 2513.5,1617 2513.5,2222 2502.5,2222 2502.5,2420
VCC_IN on Top "Top-VCC_IN" (solid, remove dead copper, pour order 124): 1996.5,137.5 1996.5,638 1589.5,638 1589.5,1347.5 2777.5,1347.5 2777.5,2183.5 2530,2183.5 2530,1600.5 1347.5,1600.5 1347.5,2145 1111,2145 1111,1210 1193.5,1210 1193.5,363 1793,363 1793,137.5
SW2_1 on Top "Top-SW2_1" (solid, remove dead copper, pour order 122): 3107.5,907.5 3162.5,907.5 3162.5,940.5 3470.5,940.5 3470.5,836 3685,836 3685,1171.5 3019.5,1171.5 3019.5,979 3107.5,979
VCC_OUT2 on Top "Top-VCC_OUT2" (solid, remove dead copper, pour order 120): 2898.5,3476 3102,3476 3102,3861 2997.5,3861 2997.5,3624.5 2898.5,3624.5
SW1_1 on Top "Top-SW1_1" (solid, remove dead copper, pour order 114): 2557.5,979 2799.5,979 2799.5,1171.5 2629,1171.5 2629,1133 2557.5,1133
SW1_1 on Top "Top-SW1_1 1" (solid, remove dead copper, pour order 112): 2678.5,1023 2557.5,1023 2557.5,968 2491.5,968 2491.5,737 2678.5,737
VCC_IN on Top "Top-VCC_IN 1" (solid, pour order 108): 1166,1210 1166,1534.5 968,1534.5 968,1281.5 770,1281.5 770,451 863.5,451 863.5,1210
GND on Top "Top-GND 8" (solid, remove dead copper, pour order 106): 2788.5,1281.5 3168,1281.5 3168,2568.5 2975.5,2568.5 2975.5,2414.5 2717,2414.5 2717,2194.5 2788.5,2194.5
VCC_OUT3 on Top "Top-VCC_OUT3" (solid, remove dead copper, pour order 100): 1474,3426.5 1688.5,3426.5 1688.5,3767.5 1584,3767.5 1584,3536.5 1474,3536.5
GND on Top "Top-GND 9" (solid, remove dead copper, pour order 98): 3135,2755.5 3135,2139.5 3349.5,2139.5 3349.5,2755.5
VCC_IN on Top "Top-VCC_IN 2" (solid, remove dead copper, pour order 96): 1556.5,1171.5 1556.5,918.5 2161.5,918.5 2161.5,1171.5
VCC_IN on Top "Top-VCC_IN 3" (solid, remove dead copper, pour order 94): 772.75,506 772.75,475.75 847,401.5 847,324.5 973.5,324.5 973.5,506
VCC_3.3V on Top "Top-VCC_3.3V" (solid, remove dead copper, pour order 92): 225.5,764.5 299.75,764.5 299.75,987.25 286,1001 286,1193.5 434.5,1193.5 434.5,1358.5 214.5,1358.5 214.5,979 236.5,957 236.5,847 225.5,836
$$$31341 on Top "Top-$$$31341" (solid, remove dead copper, pour order 90): 1754.5,2750 1958,2750 1958,2843.5 1754.5,2843.5
GND on Top "Top-GND 10" (solid, remove dead copper, pour order 86): 2843.5,3635.5 2981,3635.5 2981,3938 2321,3938 2321,3107.5 2497,3107.5 2497,3690.5 2843.5,3690.5
SW2_2 on Top "Top-SW2_2 1" (solid, remove dead copper, pour order 84): 2513.5,3305.5 2706,3305.5 2706,3465 2827,3465 2827,3674 2513.5,3674
AGND on Top "Top-AGND" (solid, remove dead copper, pour order 82): 143,737 143,825 126.5,841.5 126.5,951.5 159.5,984.5 198,984.5 198,1490.5 0,1490.5 0,412.5 176,412.5 176,671 165,671 165,737
VCC_5.0V on Top "Top-VCC_5.0V 5" (solid, remove dead copper, pour order 80): 423.5,825 423.5,957 528,957 528,1452 319,1452 319,1562 137.5,1562 137.5,1507 264,1507 264,1380.5 451,1380.5 451,1034 346.5,1034 346.5,825
GND on Top "Top-GND 11" (solid, remove dead copper, pour order 76): 1606,1188 2205.5,1188 2205.5,1210 2431,1210 2431,1331 1606,1331
SW1_3 on Top "Top-SW1_3 1" (solid, remove dead copper, pour order 72): 1116.5,2640 984.5,2640 984.5,2585 1078,2585 1078,2607 1116.5,2607
SW1_2 on Top "Top-SW1_2" (solid, remove dead copper, pour order 66): 2513.5,2711.5 2409,2711.5 2409,2634.5 2513.5,2634.5
GND on Top "Top-GND 12" (solid, remove dead copper, pour order 64): 3313.75,3096.5 3294.5,3096.5 3223,3025 3272.5,2975.5 3313.75,3016.75
GND on Top "Top-GND 13" (solid, remove dead copper, pour order 62): 1606,902 1606,654.5 2013,654.5 2013,577.5 2634.5,577.5 2634.5,720.5 2475,720.5 2475,973.5 2172.5,973.5 2172.5,902
$$$29652 on Top "Top-$$$29652" (solid, remove dead copper, pour order 60): 3184.5,2876.5 3184.5,2777.5 3338.5,2777.5 3338.5,2876.5
VCC_5.0V on Top "Top-VCC_5.0V 6" (solid, remove dead copper, pour order 58): 885.5,3025 885.5,3008.5 951.5,3008.5 951.5,3030.5 852.5,3129.5 852.5,3190 797.5,3190 797.5,3113
GND on Top "Top-GND 14" (solid, remove dead copper, pour order 54): 3113,2172.5 3113,1490.5 3107.5,1490.5 3107.5,1314.5 3949,1314.5 3949,2172.5
SW1_3 on Top "Top-SW1_3 2" (solid, remove dead copper, pour order 52): 1276,2656.5 1144,2524.5 1292.5,2524.5 1292.5,2365 1512.5,2365 1512.5,2656.5
VCC_5.0V on Top "Top-VCC_5.0V 7" (solid, remove dead copper, pour order 50): 209,737 209,770 203.5,775.5 203.5,836 220,852.5 220,935 189.75,965.25 165,965.25 144.38,944.62 144.38,852.5 160.19,836.69 160.19,753.5 181.5,753.5 181.5,687.5 242,687.5 242,737
SW2_3 on Top "Top-SW2_3" (solid, remove dead copper, pour order 48): 1094.5,2970 1276,2970 1276,3069 1358.5,3069 1358.5,3118.5 1303.5,3118.5 1303.5,3426.5 1413.5,3426.5 1413.5,3613.5 1094.5,3613.5
$$$29665 on Top "Top-$$$29665" (solid, remove dead copper, pour order 46): 2409,2612.5 2409,2436.5 2497,2436.5 2497,2612.5
$$$27242 on Top "Top-$$$27242" (solid, remove dead copper, pour order 42): 2222,990 2546.5,990 2546.5,1193.5 2222,1193.5
VCC_2 on Top "Top-VCC_2 1" (solid, remove dead copper, pour order 38): 3217.5,3058 3184.5,3058 3184.5,2909.5 3267,2909.5 3267,2964.5 3217.5,2964.5
SW1_1 on Top "Top-SW1_1 2" (solid, remove dead copper, pour order 34): 2700.5,1155 2700.5,1331 2629,1331 2629,1155
VCC_3 on Top "Top-VCC_3 1" (solid, remove dead copper, pour order 32): 1881,3047 1809.5,3047 1757.25,2994.75 1790.25,2961.75 1859,3030.5 1881,3030.5
AGND on Top "Top-AGND 1" (solid, remove dead copper, pour order 28): 440,764.5 440,489.5 522.5,489.5 522.5,280.5 594,280.5 594,313.5 654.5,313.5 654.5,423.5 753.5,423.5 753.5,764.5
GND on Top "Top-GND 15" (solid, remove dead copper, pour order 26): 1897.5,3030.5 1886.5,3030.5 1886.5,3025 1875.5,3025 1806.75,2956.25 1850.75,2912.25 1897.5,2959
GND on Top "Top-GND 16" (solid, remove dead copper, pour order 24): 1424.5,3553 1567.5,3553 1567.5,3927 880,3927 880,3124 1078,3124 1078,3630 1424.5,3630
$$$25660 on Top "Top-$$$25660" (solid, remove dead copper, pour order 22): 2447.5,1331 2447.5,1210 2612.5,1210 2612.5,1331
GND on Top "Top-GND 17" (solid, remove dead copper, pour order 18): 3107.5,1188 3701.5,1188 3701.5,819.5 3608,819.5 3608,676.5 3927,676.5 3927,1336.5 3107.5,1336.5
$$$28599 on Top "Top-$$$28599" (solid, remove dead copper, pour order 16): 665.5,297 610.5,297 610.5,264 522.5,264 522.5,104.5 429,104.5 429,192.5 297,192.5 297,66 594,66 594,209 665.5,209
SW1_2 on Top "Top-SW1_2 1" (solid, remove dead copper, pour order 8): 2563,2568.5 2722.5,2568.5 2722.5,2425.5 2964.5,2425.5 2964.5,2711.5 2706,2711.5 2706,2810.5 2508,2810.5 2508,2634.5 2563,2634.5
GND on Top "Top-GND 18" (solid, remove dead copper, pour order 6): 1694,2733.5 1694,1617 2447.5,1617 2447.5,2420 2392.5,2420 2392.5,3107.5 2497,3107.5 2497,3932.5 2277,3932.5 2277,1842.5 2068,1842.5 2068,2145 1991,2145 1991,2733.5
GND on Top "Top-GND 19" (solid, remove dead copper, pour order 4): 3041.5,2552 3168,2552 3168,3195.5 3074.5,3195.5 3074.5,3448.5 2722.5,3448.5 2722.5,3179 2783,3179 2783,3113 2810.5,3113 2810.5,2728 2981,2728 2981,2618 3041.5,2618
$$$28597 on Top "Top-$$$28597" (solid, remove dead copper, pour order 0): 665.5,192.5 610.5,192.5 610.5,66 665.5,66
GND on Bottom "Bottom-GND" (solid, remove dead copper, pour order 196): 1006.5,2634.5 1006.5,2304.5 1083.5,2304.5 1083.5,2634.5
GND on Bottom "Bottom-GND 1" (solid, remove dead copper, pour order 186): 2827,423.5 2865.5,423.5 2865.5,649 2827,649
GND on Bottom "Bottom-GND 2" (solid, remove dead copper, pour order 184): 990,5.5 1793,5.5 1793,1320 737,1320 737,478.5 990,478.5
VCC_OUT3 on Bottom "Bottom-VCC_OUT3" (solid, remove dead copper, pour order 182): 1589.5,3756.5 1589.5,3619 1683,3619 1683,3756.5
GND on Bottom "Bottom-GND 3" (solid, remove dead copper, pour order 172): 2887.5,3668.5 2981,3668.5 2981,3806 2887.5,3806
GND on Bottom "Bottom-GND 4" (solid, remove dead copper, pour order 168): 3212,2733.5 3212,2975.5 3316.5,3080 3316.5,3162.5 3166.62,3162.5 3166.62,3436.12 3080,3522.75 2928.75,3522.75 2860,3454 2205.5,3454 2205.5,2656.5 2986.5,2656.5 2986.5,2799.5 3091,2799.5 3091,2733.5
GND on Bottom "Bottom-GND 5" (solid, remove dead copper, pour order 166): 1463,3619 1562,3619 1562,3756.5 1463,3756.5
VCC_OUT2 on Bottom "Bottom-VCC_OUT2" (solid, remove dead copper, pour order 164): 2997.5,3806 2997.5,3668.5 3058,3668.5 3085.5,3696 3085.5,3806
AGND on Bottom "Bottom-AGND" (solid, remove dead copper, pour order 162): 220,1556.5 220,1507 5.5,1507 5.5,1402.5 258.5,1402.5 258.5,1556.5
AGND on Bottom "Bottom-AGND 1" (solid, remove dead copper, pour order 146): 176,1160.5 176,203.5 654.5,203.5 654.5,346.5 720.5,346.5 720.5,1160.5
GND on Bottom "Bottom-GND 6" (solid, remove dead copper, pour order 142): 3206.5,3602.5 3206.5,3289 3294.5,3289 3294.5,3080 3465,3080 3465,3190 3553,3190 3602.5,3140.5 3630,3140.5 3646.5,3157 3646.5,3520 3564,3602.5
GND on Bottom "Bottom-GND 7" (solid, remove dead copper, pour order 136): 2480.5,2381.5 2480.5,2084.5 2640,2084.5 2640,2227.5 3366,2227.5 3366,2475 2744.5,2475 2744.5,2447.5 2711.5,2447.5 2711.5,2381.5
GND on Bottom "Bottom-GND 8" (solid, remove dead copper, pour order 134): 3267,2123 3267,1974.5 3591.5,1974.5 3591.5,693 3932.5,693 3932.5,2123
GND on Bottom "Bottom-GND 9" (solid, remove dead copper, pour order 128): 1798.5,3454 1595,3454 1405.25,3264.25 1089,3264.25 963.88,3139.12 963.88,2667.5 1020.94,2610.44 1551,2610.44 1551,2728 1661,2728 1661,2667.5 1798.5,2667.5 1798.5,2920.5 1900.25,3022.25 1900.25,3074.5 1798.5,3074.5
VCC_5.0V on Bottom "Bottom-VCC_5.0V" (solid, remove dead copper, pour order 118): 858,3080 858,3195.5 517,3195.5 517,3080
GND on Bottom "Bottom-GND 10" (solid, remove dead copper, pour order 116): 1776.5,1072.5 1776.5,297 1919.5,297 1919.5,165 1716,165 1716,5.5 2112,5.5 2112,1072.5
GND on Bottom "Bottom-GND 11" (solid, remove dead copper, pour order 110): 962.5,1815 962.5,1567.5 2150.5,1567.5 2189,1606 2189,1815
GND on Bottom "Bottom-GND 12" (solid, remove dead copper, pour order 104): 1353,1974.5 2293.5,1974.5 2293.5,2101 1353,2101
GND on Bottom "Bottom-GND 13" (solid, remove dead copper, pour order 102): 2205.5,2673 2205.5,1974.5 3305.5,1974.5 3305.5,2123 2513.5,2123 2513.5,2673
AGND on Bottom "Bottom-AGND 2" (solid, remove dead copper, pour order 88): 236.5,3311 236.5,3080 500.5,3080 500.5,3311
GND on Bottom "Bottom-GND 14" (solid, remove dead copper, pour order 78): 2271.5,1925 2271.5,1474 3289,1474 3289,1925
VCC_5.0V on Bottom "Bottom-VCC_5.0V 1" (solid, remove dead copper, pour order 70): 231,1633.5 143,1633.5 143,1523.5 203.5,1523.5 203.5,1573 231,1573
GND on Bottom "Bottom-GND 15" (solid, remove dead copper, pour order 68): 2277,3806 2277,3616.25 2609.75,3616.25 2662,3668.5 2909.5,3668.5 2909.5,3806
VCC_OUT1 on Bottom "Bottom-VCC_OUT1" (solid, remove dead copper, pour order 56): 3800.5,654.5 3630,654.5 3630,572 3800.5,572
AGND on Bottom "Bottom-AGND 3" (solid, remove dead copper, pour order 44): 671,225.5 671,132 973.5,132 973.5,225.5
AGND on Bottom "Bottom-AGND 4" (solid, remove dead copper, pour order 40): 209,1430 11,1430 11,0 973.5,0 973.5,225.5 209,225.5
GND on Bottom "Bottom-GND 16" (solid, remove dead copper, pour order 36): 1848,3454 1848,3206.5 1870,3206.5 1870,3014 2178,3014 2178,3454
GND on Bottom "Bottom-GND 17" (solid, remove dead copper, pour order 30): 3630,786.5 3630,693 3800.5,693 3800.5,786.5
GND on Bottom "Bottom-GND 18" (solid, remove dead copper, pour order 20): 973.5,2304.5 973.5,2175.25 970.75,2175.25 1171.5,1974.5 1408,1974.5 1408,2101 1204.5,2101 1204.5,2194.5 1974.5,2194.5 1974.5,2499.75 1911.25,2499.75 1782,2370.5 1292.5,2370.5 1292.5,2332 1001,2332
VCC_IN on Bottom "Bottom-VCC_IN" (solid, remove dead copper, pour order 14): 973.5,462 847,462 847,352 825,330 671,330 671,242 973.5,242
GND on Bottom "Bottom-GND 19" (solid, remove dead copper, pour order 12): 2370.5,1144 2222,1144 2222,577.5 2370.5,577.5
GND on Bottom "Bottom-GND 20" (solid, remove dead copper, pour order 10): 1672,1320 1672,1056 2288,1056 2409,1177 2684,1177 2684,638 3289,638 3289,1278.75 3239.5,1320
GND on Bottom "Bottom-GND 21" (solid, remove dead copper, pour order 2): 3030.5,129.25 3030.5,440 2662,440 2626.25,404.25 2626.25,291.5 2662,291.5 2662,176 2708.75,129.25
AGND on GND "GND-AGND" (solid, remove dead copper, pour order 176): 896.5,3932.5 -44,3932.5 -44,5.5 720.5,5.5 720.5,1347.5 896.5,1347.5
GND on GND "GND-GND" (solid, remove dead copper, pour order 74): 737,-5.5 3971,-5.5 3971,3998.5 913,3998.5 913,1331 737,1331 737,451 836,451 836,335.5 737,335.5
VCC_IN on Solder Mask Top (solid): 1963.5,308 1963.5,605 1567.5,605 1567.5,1375 2755.5,1375 2755.5,1628 2552,1628 2552,1573 1133,1573 1133,1248.5 1292.5,1248.5 1292.5,467.5 1815,467.5 1815,308
VCC_3.3V on PWR "PWR-VCC_3.3V" (solid, remove dead copper, pour order 204): -82.5,-5.5 3998.5,-5.5 3998.5,3982 -82.5,3982

## Keep-outs
Keep-Out Layer:
  lines w4: 744.09,393.7 830.71,393.7 ; 744.09,3543.31 830.71,3543.31 ; 3106.3,393.7 3192.91,393.7 ; 3110.24,3543.31 3188.98,3543.31 ; 0,118.11 ccw(c118.11,118.11) 118.11,0 3818.9,0 ccw(c3818.9,118.11) 3937.01,118.11 3937.01,3818.9 ccw(c3818.9,3818.9) 3818.9,3937.01 118.11,3937.01 ccw(c118.11,3818.9) 0,3818.9 0,118.11

## Other copper
GND:
  pour cut-out: 3628.5,3499.39 3628.5,3488.39 3634,3488.39 3634,3499.39 3628.5,3499.39
  pour cut-out: 2814.5,402.89 2814.5,397.39 2820,397.39 2820,402.89 2814.5,402.89
  pour cut-out: 213,1321.39 213,1222.39 251.5,1222.39 251.5,1321.39 213,1321.39
  pour cut-out: 3623,3433.39 3623,3422.39 3634,3422.39 3634,3433.39 3623,3433.39
  pour cut-out: 273.5,1315.89 273.5,1222.39 312,1222.39 312,1315.89 273.5,1315.89
  pour cut-out: 2869.5,424.89 2869.5,408.39 2886,408.39 2886,424.89 2869.5,424.89
  pour cut-out: 3342.5,3295.89 3342.5,3284.89 3359,3284.89 3359,3295.89 3342.5,3295.89
  pour cut-out: 1874,3295.89 1874,3279.39 1885,3279.39 1885,3295.89 1874,3295.89
  pour cut-out: 2941,155.39 2941,144.39 2957.5,144.39 2957.5,155.39 2941,155.39
  pour cut-out: 2154.5,3416.89 2154.5,3405.89 2160,3405.89 2160,3416.89 2154.5,3416.89
  pour cut-out: 3623,3361.89 3623,3350.89 3634,3350.89 3634,3361.89 3623,3361.89
  pour cut-out: 834.5,441.39 834.5,358.89 966.5,358.89 966.5,441.39 834.5,441.39
  pour cut-out: 3623,3169.39 3623,3152.89 3634,3152.89 3634,3169.39 3623,3169.39
  pour cut-out: 2149,3279.39 2149,3273.89 2160,3273.89 2160,3279.39 2149,3279.39
  pour cut-out: 306.5,1766.89 306.5,1739.39 389,1739.39 389,1766.89 306.5,1766.89
  pour cut-out: 2759.5,155.39 2759.5,144.39 2770.5,144.39 2770.5,155.39 2759.5,155.39
  pour cut-out: 2022.5,3328.89 2022.5,3317.89 2033.5,3317.89 2033.5,3328.89 2022.5,3328.89
  pour cut-out: 2908,287.39 2908,276.39 2919,276.39 2919,287.39 2908,287.39
  pour cut-out: 2693.5,160.89 2693.5,144.39 2710,144.39 2710,160.89 2693.5,160.89
  pour cut-out: 2820,155.39 2820,144.39 2831,144.39 2831,155.39 2820,155.39
  pour cut-out: 86.5,1893.39 -7,1893.39 -7,1684.39 86.5,1684.39 86.5,1893.39
  pour cut-out: 1593.5,3735.89 1593.5,3631.39 1676,3631.39 1676,3735.89 1593.5,3735.89
  pour cut-out: 1923.5,3224.39 1923.5,3213.39 1934.5,3213.39 1934.5,3224.39 1923.5,3224.39
  pour cut-out: 2880.5,155.39 2880.5,144.39 2891.5,144.39 2891.5,155.39 2880.5,155.39
  pour cut-out: 2149,3086.89 2149,3070.39 2160,3070.39 2160,3086.89 2149,3086.89
  pour cut-out: 2143.5,3218.89 2143.5,3207.89 2160,3207.89 2160,3218.89 2143.5,3218.89
  pour cut-out: 2149,3152.89 2149,3141.89 2165.5,3141.89 2165.5,3152.89 2149,3152.89
  pour cut-out: 3458,3400.39 3458,3383.89 3474.5,3383.89 3474.5,3400.39 3458,3400.39
  pour cut-out: 3623,3295.89 3623,3279.39 3634,3279.39 3634,3295.89 3623,3295.89
  pour cut-out: 3304,3367.39 3304,3356.39 3320.5,3356.39 3320.5,3367.39 3304,3367.39
  pour cut-out: 2149,3350.89 2149,3339.89 2160,3339.89 2160,3350.89 2149,3350.89
  pour cut-out: 334,1315.89 334,1227.89 372.5,1227.89 372.5,1315.89 334,1315.89
  pour cut-out: 3623,3235.39 3623,3218.89 3634,3218.89 3634,3235.39 3623,3235.39
  pour cut-out: 394.5,1315.89 394.5,1277.39 433,1277.39 433,1315.89 394.5,1315.89
  pour cut-out: 3001.5,155.39 3001.5,144.39 3012.5,144.39 3012.5,155.39 3001.5,155.39
  pour cut-out: 482.5,2377.39 482.5,2333.39 499,2333.39 499,2377.39 482.5,2377.39